# Altium PCB JLINK_OB_TYPEC.PcbDoc
Units mil, origin at the board's own origin, x right, y up, seen from the top; angles counter-clockwise.
Board outline 590.55 x 1299.21 mil, 2 copper layers (Top Layer, Bottom Layer), stack 61.855 mil thick; 26 components, 25 nets, 143 pads, 33 vias.
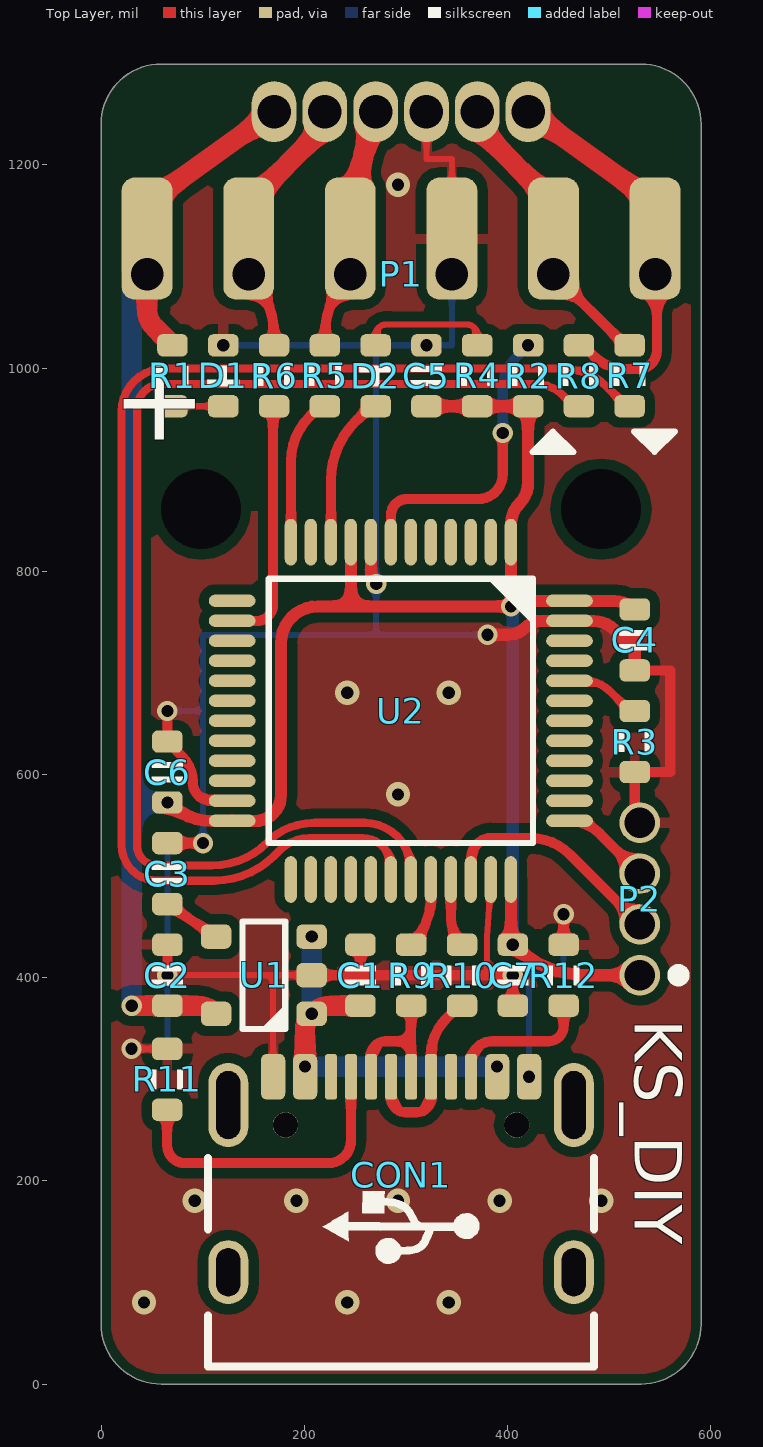
[diagram p0: Top Layer view]
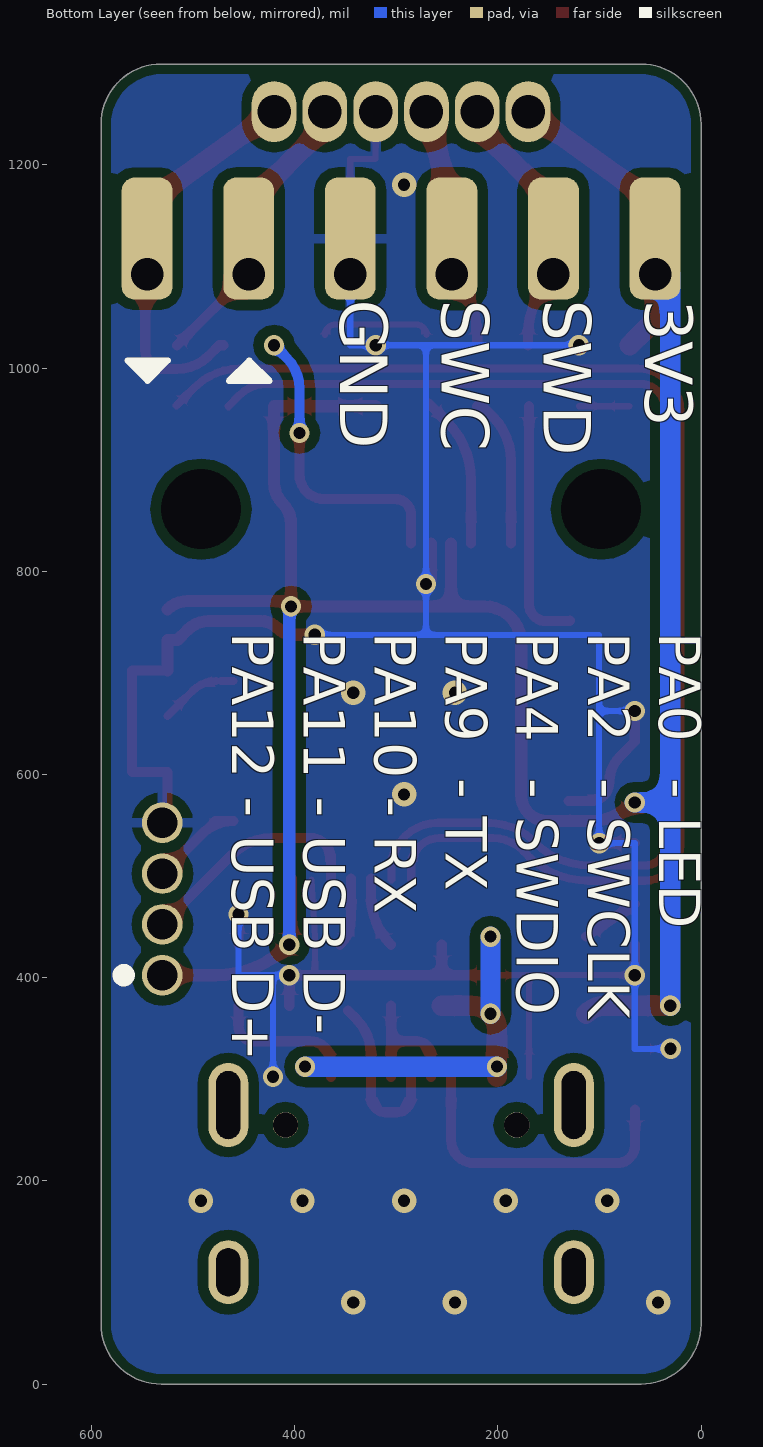
[diagram p1: Bottom Layer view, seen from below]
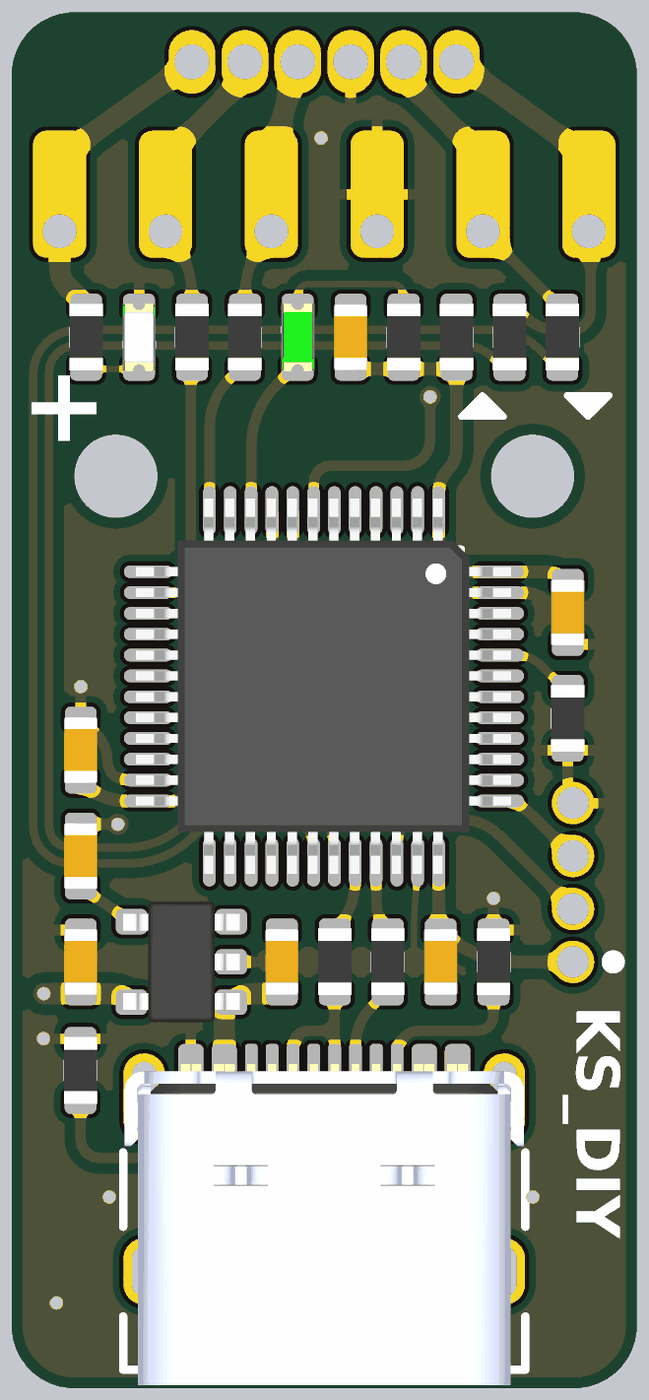
[diagram p2: 3D render of the assembled board from above, using the file's embedded part models]

## Layer stack, top to bottom
Top Solder: solder mask 0.4, Solder Resist, Dk 3.5
Top Layer: signal copper 1.4
Dielectric 1: dielectric 59.0551, FR-4, Dk 4.8
Bottom Layer: signal copper 1.4
Bottom Solder: solder mask 0.4, Solder Resist, Dk 3.5

## Board outline
0,59.06 0,1240.16 cw(c59.06,1240.16) 59.06,1299.21 531.5,1299.21 cw(c531.5,1240.16) 590.55,1240.16 590.55,59.06 cw(c531.5,59.06) 531.5,0 59.06,0 cw(c59.06,59.06)

## Design rules (kind name [scope] priority, off if disabled: settings)
BoardOutlineClearance [All] p1: gap=10 ignorepadtopadclearanceinfootprint=FALSE
Clearance "Clearance Polygon 10mil" [InPolygon] p1: gap=10 ignorepadtopadclearanceinfootprint=TRUE except(0: Arc-Hole Track-Hole SMDPad-Hole THPad-Hole Via-Hole Fill-Hole Poly-Hole Region-Hole Text-Hole)
Clearance "Clearance Top Layer 6mil" [OnLayer('Top Layer')] p2: gap=6 ignorepadtopadclearanceinfootprint=TRUE except(8: Arc-Hole Track-Hole SMDPad-Hole THPad-Hole Via-Hole Fill-Hole Poly-Hole Region-Hole Text-Hole; 10: Arc-Text Track-Text SMDPad-Text THPad-Text Via-Text Fill-Text Poly-Text Region-Text Text-Text)
Clearance "Clearance Top Layer 5mil" [OnLayer('Top Layer')] p3 off: gap=5 ignorepadtopadclearanceinfootprint=TRUE except(8: Arc-THPad Arc-Hole Track-THPad Track-Hole SMDPad-THPad SMDPad-Hole THPad-THPad THPad-Hole Via-Hole Fill-Hole Poly-Hole Region-Hole Text-Hole; 10: Arc-Text Track-Text SMDPad-Text THPad-Text Via-Text Fill-Text Poly-Text Region-Text Text-Text)
Clearance "Clearance Bottom Layer 6mil" [OnLayer('Bottom Layer')] p4: gap=6 ignorepadtopadclearanceinfootprint=TRUE except(8: Arc-THPad Arc-Hole Track-THPad Track-Hole SMDPad-THPad SMDPad-Hole THPad-THPad THPad-Hole Via-Hole Fill-Hole Poly-Hole Region-Hole Text-Hole; 10: Arc-Text Track-Text SMDPad-Text THPad-Text Via-Text Fill-Text Poly-Text Region-Text Text-Text)
Clearance "Clearance Bottom Layer 5mil" [OnLayer('Bottom Layer')] p5 off: gap=5 ignorepadtopadclearanceinfootprint=TRUE except(8: Arc-THPad Arc-Hole Track-THPad Track-Hole SMDPad-THPad SMDPad-Hole THPad-THPad THPad-Hole Via-Hole Fill-Hole Poly-Hole Region-Hole Text-Hole; 10: Arc-Text Track-Text SMDPad-Text THPad-Text Via-Text Fill-Text Poly-Text Region-Text Text-Text)
Clearance "Clearance 6mil" [All] p6: gap=6 ignorepadtopadclearanceinfootprint=TRUE except(8: Arc-THPad Arc-Hole Track-THPad Track-Hole SMDPad-THPad SMDPad-Hole THPad-THPad THPad-Hole Via-Hole Fill-Hole Poly-Hole Region-Hole Text-Hole; 10: Arc-Text Track-Text SMDPad-Text THPad-Text Via-Text Fill-Text Poly-Text Region-Text Text-Text)
Clearance "Clearance 5mil" [All] p7 off: gap=5 ignorepadtopadclearanceinfootprint=TRUE except(8: Arc-THPad Arc-Hole Track-THPad Track-Hole SMDPad-THPad SMDPad-Hole THPad-THPad THPad-Hole Via-Hole Fill-Hole Poly-Hole Region-Hole Text-Hole; 10: Arc-Text Track-Text SMDPad-Text THPad-Text Via-Text Fill-Text Poly-Text Region-Text Text-Text)
Clearance "Clearance 4mil" [All] p8 off: gap=5 ignorepadtopadclearanceinfootprint=TRUE except(4: Arc-Arc Arc-Track Arc-SMDPad Track-Track Track-SMDPad SMDPad-SMDPad; 8: Arc-THPad Arc-Hole Track-THPad Track-Hole SMDPad-THPad SMDPad-Hole THPad-THPad THPad-Hole Via-Hole Fill-Hole Poly-Hole Region-Hole Text-Hole; 10: Arc-Text Track-Text SMDPad-Text THPad-Text Via-Text Fill-Text Poly-Text Region-Text Text-Text)
ComponentClearance [All] p1: gap=0 collisioncheckmode=3 verticalgap=0 showdistances=FALSE
Height [All] p1: minheight=0 maxheight=5000 prefheight=500
HoleSize [All] p1: absolutevalues=TRUE maxlimit=248.03 minlimit=8 maxpercent=80.000 minpercent=20.000
MinimumAnnularRing [All] p1: minimumring=3
MinimumSolderMaskSliver [All] p1: minsoldermaskwidth=0
PlaneConnect [All] p1: pad.planeconnectstyle=Relief pad.reliefexpansion=20 pad.reliefentries=4 pad.reliefconductorwidth=10 pad.reliefairgap=10 via.planeconnectstyle=Direct via.reliefexpansion=20 via.reliefentries=4 via.reliefconductorwidth=10 via.reliefairgap=10
PolygonConnect [All] p1: thpad.connectstyle=Relief thpad.reliefconductorwidth=10 thpad.reliefentries=4 thpad.polygonreliefangle="90 Angle" thpad.airgapwidth=10 smdpad.connectstyle=Relief smdpad.reliefconductorwidth=10 smdpad.reliefentries=4 smdpad.polygonreliefangle="90 Angle" smdpad.airgapwidth=10 via.connectstyle=Direct via.reliefconductorwidth=10 via.reliefentries=4 via.polygonreliefangle="90 Angle" via.airgapwidth=10
RoutingCorners [All] p1: cornerstyle=Round minsetback=100 maxsetback=100
RoutingVias [All] p1: holewidth=20 width=40 viastyle="Through Hole" minholewidth=8 minwidth=18 maxholewidth=40 maxwidth=80
SMDEntry [All] p1: side=TRUE corner=TRUE anyangle=TRUE
SMDToCorner [All] p1: distance=0
SMDToPlane [All] p1: distance=0
SilkToSilkClearance [All] p1: silktosilkclearance=4
SilkToSolderMaskClearance [IsPad] p1: minsilkscreentomaskgap=0 clearancetoexposedcopper=TRUE
SolderMaskExpansion [All] p1: expansion=4 istentingtop=FALSE
UnRoutedNet [All] p1: checkbadconnections=TRUE
ViasUnderSMD [All] p1: allowed=TRUE
Width "Width 6mil" [All] p1: maxlimit=100 minlimit=6 preferedwidth=15 minimp=50.000000 maximp=50.000000 favimp=50.000000
Width "Width 5mil" [All] p2 off: maxlimit=100 minlimit=5 preferedwidth=15 minimp=50.000000 maximp=50.000000 favimp=50.000000
21 further rules are at their usual default settings.

## Components (designator, comment, footprint, x,y, rotation, side; value= is the part's Value field where it differs from the comment)
C1 "C0603" CAP_0603 255.28,402.48 r270 top value=10uF
C2 "C0603" CAP_0603 65.28,402.48 r270 top value=4.7uF
C3 "C0603" CAP_0603 65.28,502.48 r270 top value=NC
C4 "C0603" CAP_0603 525.28,732.48 r90 top value=0.1uF
C5 "C0603" CAP_0603 320.28,992.48 r270 top value=0.1uF
C6 "C0603" CAP_0603 65.28,602.48 r270 top value=0.1uF
C7 "C0603" CAP_0603 405.28,402.48 r90 top value=0.1uF
CON1 "USB Type C" USB_TypeC_16P 295.28,152.48 r0 top locked value="Type C"
D1 "D0603" LED_0603_YELLOW 120.28,992.48 r270 top value=WHITE
D2 "D0603" LED_0603_GREEN 270.28,992.48 r90 top value=GREEN
P1 "HDR1x6" HDR1X6_2.54_180 45.28,1092.48 r90 top value=2.54
P2 "HDR1x4" HDR1X4_1.27_180 530.28,402.48 r180 top value=1.27
R1 "R0603" RES_0603 70.28,992.48 r90 top value=1K
R2 "R0603" RES_0603 420.28,992.48 r270 top value=10K
R3 "R0603" RES_0603 525.28,632.48 r90 top value=10K
R4 "R0603" RES_0603 370.28,992.48 r270 top value=1K
R5 "R0603" RES_0603 220.28,992.48 r270 top value=100R
R6 "R0603" RES_0603 170.28,992.48 r270 top value=100R
R7 "R0603" RES_0603 520.28,992.48 r270 top value=100R
R8 "R0603" RES_0603 470.28,992.48 r270 top value=100R
R9 "R0603" RES_0603 305.28,402.48 r90 top value=22R
R10 "R0603" RES_0603 355.28,402.48 r90 top value=22R
R11 "R0603" RES_0603 65,300 r270 top value=5.1K
R12 "R0603" RES_0603 455.28,402.48 r270 top value=5.1K
U1 "XC6220B331" SOT23-5 160.28,402.48 r180 top value=3.3V
U2 "STM32F072CBT6" LQFP48_P0.5_7.0x7.0 295,662.73 r270 top value=48MHz

## Footprints (in the part's own frame and the unit in brackets; to place one, negate y for a bottom-side part, rotate by r counter-clockwise, add the part's x,y. Pads: shape width x height; smd on the part's side, far side on the other; paste and mask are expansions set on the pad)
CAP_0603 [mil]
  rrect50% 22x30 smd: 1(-30,0) 2(30,0)
  silkscreen extent -10,-15 10,15, body extent -31,-16 31,16, height 31
HDR1X4_1.27_180 [mil]
  round 40 hole 30: 1(0,0) 2(0,-50) 3(0,-100) 4(0,-150)
HDR1X6_2.54_180 [mil]
  round 50 hole 32: 1(0,0) 2(0,-100) 3(0,-200) 4(0,-300) 5(0,-400) 6(0,-500)
LED_0603_GREEN [mil]
  rrect50% 22x30 smd: 1(30,0) 2(-30,0)
  silkscreen extent -10,-16 10,16, body extent -32,-16 32,16, height 24
LED_0603_YELLOW [mil]
  rrect50% 22x30 smd: 1(30,0) 2(-30,0)
  silkscreen extent -10,-16 10,16, body extent -32,-16 32,16, height 24
LQFP48_P0.5_7.0x7.0 [mil]
  oval 46x12 smd: 1(-166,108.27) 2(-166,88.58) 3(-166,68.9) 4(-166,49.21) 5(-166,29.53) 6(-166,9.84) 7(-166,-9.84) 8(-166,-29.53) 9(-166,-49.21) 10(-166,-68.9) 11(-166,-88.58) 12(-166,-108.27) 25(166,-108.27) 26(166,-88.58) 27(166,-68.9) 28(166,-49.21) 29(166,-29.53) 30(166,-9.84) 31(166,9.84) 32(166,29.53) 33(166,49.21) 34(166,68.9) 35(166,88.58) 36(166,108.27)
  oval 12x46 smd: 13(-108.27,-166) 14(-88.58,-166) 15(-68.9,-166) 16(-49.21,-166) 17(-29.53,-166) 18(-9.84,-166) 19(9.84,-166) 20(29.53,-166) 21(49.21,-166) 22(68.9,-166) 23(88.58,-166) 24(108.27,-166) 37(108.27,166) 38(88.58,166) 39(68.9,166) 40(49.21,166) 41(29.53,166) 42(9.84,166) 43(-9.84,166) 44(-29.53,166) 45(-49.21,166) 46(-68.9,166) 47(-88.58,166) 48(-108.27,166)
  silkscreen extent -130,-130 130,130, body extent -177,-178 177,177, height 61
RES_0603 [mil]
  rrect50% 22x30 smd: 1(-30,0) 2(30,0)
  silkscreen extent -10,-16 10,16, body extent -31,-16 31,16, height 18
SOT23-5 [mil]
  rrect50% 30x24 smd: 1(-47,38) 2(-47,0) 3(-47,-38) 4(47,-38) 5(47,38)
  silkscreen extent -21,-53 21,53, body extent -55,-57 55,57, height 45
USB_TypeC_16P [mm]
  rrect50% 0.61x1.143 smd: 1(-3.2,3.81) 2(-2.4,3.81) 11(2.4,3.81) 12(3.2,3.81)
  rrect50% 0.305x1.143 smd: 3(-1.75,3.81) 4(-1.25,3.81) 5(-0.75,3.81) 6(-0.25,3.81) 7(0.25,3.81) 8(0.75,3.81) 9(1.25,3.81) 10(1.75,3.81)
  oval 1x2.1 hole 0.6 slot 1.7 at 90 deg: SH(-4.32,3.105) SH(4.32,3.105)
  oval 1x1.6 hole 0.6 slot 1.2 at 90 deg: SH(-4.32,-1.075) SH(4.32,-1.075)
  round 0.635 hole 0.635 unplated: ""(-2.89,2.605) ""(2.89,2.605)
  silkscreen extent -4.83,-3.43 4.83,1.78, body extent -4.79,-3.8 4.79,3.91, height 3.31

## Part data
C1 C2 C3 C4 C5 C6 C7: library part Cap_0603, "Capacitor", Note=?0%, Specification="X7R, 16V", Type=0603
CON1: library part USB_TypeC_16P_A, "USB", Type=Female
D1 D2: library part LED_0603, "LED", Type=0603
P1: library part HDR1x6_2.54T, "Header", Note=1x6, Type=DIP
P2: library part HDR1x4_1.27, "Header", Note=1x4, Type=DIP
R1 R2 R3 R4 R5 R6 R7 R8 R9 R10 R11 R12: library part Res_0603, "Resistor", Note=?%, Specification=1/10W, Type=0603
U1: library part XC6220x_SOT25, "LDO", Manufacturer="Torex Semiconductor", Datasheet=https://www.torexsemi.com/file/xc6220/XC6220.pdf, Link=https://www.torexsemi.com/products/single-type-voltage-regulators/series/?name=xc6220, Note=6.5V, Specification=1000mA, Type=SOT23-5
U2: library part STM32F072CxT, "MCU ST", Manufacturer=STMicroelectronics, Datasheet=https://www.st.com/resource/en/datasheet/stm32f072cb.pdf, Link=https://www.st.com/content/st_com/en/products/microcontrollers-microprocessors/stm32-32-bit-arm-cortex-mcus/stm32-mainstream-mcus/stm32f0-series/stm32f0x2/stm32f072cb.html, Note=CortexM0, Specification="128K Flash, 16K SRAM", Type=LQFP48

## Free pads (board coordinates)
  rrect50% 50x120 smd paste-100: 1(45.28,1127.48) 1(145.28,1127.48) 1(245.28,1127.48) 1(345.28,1127.48) 1(445.28,1127.48) 1(545.28,1127.48)
  rrect50% 50x120 smd far side paste-100: 1(45.28,1127.48) 1(145.28,1127.48) 1(245.28,1127.48) 1(345.28,1127.48) 1(445.28,1127.48) 1(545.28,1127.48)
  oval 0x50 hole 78.74 unplated: 1(98.43,861.14) 1(492.13,861.14)
  oval 44x60 hole 33: 1(170.28,1252.48) 1(220.28,1252.48) 1(270.28,1252.48) 1(320.28,1252.48) 1(370.28,1252.48) 1(420.28,1252.48)

## Via types
v1: diameter 20, hole 12, Top Layer to Bottom Layer, tented both sides, 21 vias
v2: diameter 24, hole 12, Top Layer to Bottom Layer, tented both sides, 12 vias

## Nets (pads, with @x,y where several pads share a name; then routed paths per layer and width w, separated by ;. In a path a pad name is that pad's centre, name@x,y a point inside that pad or via, vN(x,y) a via of type N, cw(c..) or ccw(c..) an arc to the next point about the centre after c; other vN are vias at no path point)
+3V3: C2.2 C4.2 C5.2 C6.2 C7.2 P1.1 P2.1 pad.1@45.28,1127.48 pad.1@170.28,1252.48 R1.2 R2.2 R4.2 U1.5 U2.1 U2.9 U2.24 U2.36 U2.48 | length 2656.3
  Top Layer w12: v1(65.28,572.48) ccw(c109.38,616.58) 109.38,554.21 U2.24@130.28,554.21 ; U2.24 129.25,554.21 151.63,554.21 ccw(c151.63,579.63) 177.05,579.63 177.05,729.25 cw(c213.28,729.25) 213.28,765.48 246.06,765.48 ; U2.9@246.06,827.48 246.06,765.48 ; C5.2 R4.2 R2.2 420.28,887.11 cw(c391.71,887.11) 411.91,866.91 ccw(c432.11,846.71) 403.54,846.71 403.54,827.48 v1@403.54,770.75 ; C7.2@403.54,432.48 U2.36@403.54,497.48 ; v1(405.28,432.48) ccw(c477.7,504.91) 477.7,402.48 477.77,402.48 P2.1 ; C4.2 ccw(c505.32,742.52) 505.32,770.75 460.28,770.75 v1@403.54,770.75 ; 246.06,765.48 v1(403.54,765.48) v1@403.54,770.75
  Top Layer w20: v1(30.28,372.48) C2.2 93.96,372.48 cw(c93.96,345.17) U1.5 ; P1.1 45.28,1057.48 ccw(c69.42,1057.48) 52.33,1040.42 R1.2 ; pad.1@45.28,1162.48 pad.1@170.28,1252.48
  Bottom Layer w12: v1(405.28,432.48) v1@405.28,765.48
  Bottom Layer w20: v1(30.28,372.48) 30.28,572.48 ; P1.1@30.28,1092.48 30.28,572.48 ; P1.1 pad.1@45.28,1127.48 ; v1(65.28,572.48) 30.28,572.48
+VIN: C1.2 CON1.2 CON1.11 U1.1 U1.3 | length 378.8
  Top Layer w20: CON1.2 v1(200.79,312.48) 200.79,348.82 cw(c222.94,348.82) v1(207.28,364.48) cw(c226.59,345.17) 226.59,372.48 C1.2
  Bottom Layer w20: v1(200.79,312.48) v1(389.76,312.48) ; v1(207.28,364.48) v1(207.28,440.48)
BOOT: R3.2 U2.44 | length 72.9
  Top Layer w8: U2.44@460.28,692.01 U2.44@472.27,692.01 ; U2.44@477.27,692.01 cw(c477.27,659.48) 500.27,682.49 R3.2@525.28,657.48
D+: CON1.6 CON1.8 R10.1 | length 169.2
  Top Layer w10: CON1.6 285.43,281.81 ccw(c299.69,281.81) 299.69,267.56 310.55,267.56 ccw(c310.55,281.81) 324.8,281.81 CON1.8 324.8,324.02 cw(c374.98,324.02) 339.5,359.5 R10.1@347.48,367.48
D-: CON1.5 CON1.7 R9.1 | length 138.2
  Top Layer w10: CON1.5 265.75,323.15 cw(c280,323.15) 280,337.4 305.12,337.4 ; CON1.7 305.12,337.4 ; R9.1 305.12,372.32 305.12,337.4
GND: C1.1 C2.1 C3.1 C4.1 C5.1 C6.1 C7.1 CON1.1 CON1.12 D1.2 P1.4 P2.4 pad.1@320.28,1252.48 pad.1@345.28,1127.48 R3.1 R11.1 R12.1 U1.2 U2.8 U2.23 U2.35 U2.47 | length 3063.3
  Top Layer w6: v1(30,330) R11.1 ; v1(65.28,402.48) 169.29,402.48 ; CON1.1 169.29,402.48 ; U1.2 169.29,402.48 ; pad.1@320.28,1252.48 320.28,1206 345.28,1206 pad.1@345.28,1127.48 ; 380,402.48 380,439.81 ; 380.01,440.19 U2.35
  Top Layer w10: v1(65.28,402.48) C2.1 ; C3.1 v1(100.28,532.48) ; v1(65.28,662.48) C6.1 79.67,618.09 cw(c54.06,592.48) 90.28,592.48 ccw(c108.86,592.48) 108.86,573.9 U2.23@130.28,573.9 ; U1.2 255.28,402.48 ; C1.1 255.28,402.48 ; C7.1 v1(405.28,402.48) 380,402.48 255.28,402.48 ; R12.1 v1(455.28,462.48) ; P2.4@525.28,557.48 R3.1 560.28,602.48 560.28,702.48 C4.1
  Top Layer w12: U2.8@265.75,827.48 265.75,792.48 v1(270.75,787.48) ; v1(380.28,737.48) 400.67,737.48 ccw(c400.67,760.67) 417.07,744.27 cw(c433.46,727.88) 433.46,751.06 484.56,751.06 cw(c484.56,721.76) 505.28,742.48 515.28,732.48 525.28,732.48 C4.1
  Bottom Layer w6: v1(30,330) 65.28,330 v1(65.28,402.48) 65.28,532.48 v1(100.28,532.48) 100.28,662.48 ; v1(65.28,662.48) 100.28,662.48 ; v1(120.28,1022.48) 270.75,1022.48 ; P1.4 345.28,1022.48 v1(320.28,1022.48) 270.75,1022.48 ; v1(380.28,737.48) 270.75,737.48 ; v1(405.28,402.48) 421.26,402.48 ; v1(421.26,302.48) 421.26,402.48 ; v1(455.28,462.48) 455.28,402.48 421.26,402.48 ; 100.28,662.48 100.28,737.48 270.75,737.48 ; 270.75,737.48 v1(270.75,787.48) 270.75,1022.48
  Bottom Layer w10: P1.4 pad.1@345.28,1127.48
  other v2: 42.28,80.48 242.28,80.48 342.28,80.48 92.28,180.48 192.28,180.48 292.28,180.48 392.28,180.48 492.28,180.48 292.28,580.48 242.28,680.48 342.28,680.48 292.28,1180.48
JK_LED: D2.2 U2.10 | length 151.1
  Top Layer w10: U2.10@226.38,827.48 226.38,889.79 cw(c307.97,889.79) 250.28,947.48 D2.2@267.78,964.98
JK_RX: R8.2 U2.31 | length 1209.3
  Top Layer w8: 163.74,533.17 cw(c108.93,588.04) 108.93,510.48 55.28,510.48 cw(c55.28,530.48) 35.28,530.48 35.28,959.48 cw(c60.28,959.48) 60.28,984.48 427.72,984.48 cw(c427.72,946.92) 454.25,973.51 ; 163.77,533.2 165.79,535.21 cw(c205.06,495.94) 165.85,535.27 cw(c205.06,495.94) 192.75,550.1 ccw(c190.97,557.9) 193.07,550.18 cw(c210.32,486.64) 210.32,552.48 ; 210.37,552.48 259.16,552.48 cw(c259.16,506.8) 304.84,506.8 U2.31 ; 454.28,973.48 R8.2@465.28,962.48
JK_SWC: R5.2 U2.12 | length 148.5
  Top Layer w10: U2.12@187.01,827.48 187.01,908.38 cw(c249.38,908.38) 205.28,952.48 211.74,958.94 cw(c220.28,950.41) R5.2
JK_SWD: R6.2 U2.14 | length 244.8
  Top Layer w10: U2.14 129.25,751.06 152.86,751.06 ccw(c152.86,767.48) 169.28,767.48 R6.2@169.28,962.48
JK_TX: R7.2 U2.30 | length 1285.1
  Top Layer w8: 175.69,525.31 170.5,520.13 cw(c111,579.62) 111,495.48 55.28,495.48 cw(c55.28,530.48) 20.28,530.48 20.28,957.48 cw(c62.28,957.48) 62.28,999.48 454.26,999.48 cw(c454.26,937.46) 498.09,981.33 ; 175.7,525.33 cw(c205.06,495.94) 205.06,537.48 257.43,537.48 cw(c257.43,509.67) 285.25,509.67 285.25,496.82 U2.30 ; 498.11,981.32 R7.2@516.28,963.15
NetC3_2: C3.2 U1.4 | length 57.7
  Top Layer w10: C3.2 U1.4
NetCON1_4: CON1.4 R11.2 | length 301.4
  Top Layer w10: R11.2 65,235 ccw(c82.52,235) 82.52,217.48 223.43,217.48 ccw(c223.43,240.11) 246.06,240.11 CON1.4
NetCON1_10: CON1.10 R12.2 | length 145.7
  Top Layer w10: CON1.10 364.17,316.69 cw(c384.96,316.69) 384.96,337.48 440.28,337.48 ccw(c440.28,352.48) 455.28,352.48 R12.2
NetD1_1: D1.1 R1.1 | length 50
  Top Layer w6: R1.1 D1.1
NetD2_1: D2.1 R4.1 | length 111.4
  Top Layer w6: D2.1@270.28,1032.81 cw(c280.28,1032.81) 280.28,1042.81 360.28,1042.81 cw(c360.28,1032.81) R4.1@370.28,1032.81
RST: R2.1 U2.7 | length 291.3
  Top Layer w10: U2.7@285.43,827.48 285.43,855.43 cw(c301.15,855.43) 301.15,871.15 371.15,871.15 ccw(c371.15,895.28) 395.28,895.28 v1(395.28,936.15)
  Bottom Layer w10: v1@395.28,941.15 395.28,979.8 cw(c437.95,979.8) 407.78,1009.98 v1(420.28,1022.48)
SWCLK: P2.3 U2.37 | length 107.8
  Top Layer w10: U2.37@478.54,554.21 460.28,554.21 cw(c460.28,510.11) 491.46,541.3 P2.3
SWDIO: P2.2 U2.34 | length 230.2
  Top Layer w10: U2.34@364.28,497.58 364.28,517.48 cw(c384.28,517.48) 384.28,537.48 422.5,537.48 cw(c422.5,482.5) 461.34,521.41 ; 461.38,521.38 P2.2
TG_RX: P1.5 pad.1@370.28,1252.48 pad.1@445.28,1127.48 R7.1 | length 220.1
  Top Layer w10: P1.5@445.78,1092.48 R7.1@515.78,1022.48
  Top Layer w20: pad.1@370.28,1252.48 370.28,1237.48 pad.1@445.28,1162.48
TG_SWC: P1.3 pad.1@245.28,1127.48 pad.1@270.28,1252.48 R5.1 | length 170.1
  Top Layer w10: R5.1 220.28,1032.13 cw(c305.63,1032.13) P1.3
  Top Layer w20: pad.1@245.28,1162.48 pad.1@270.28,1252.48
TG_SWD: P1.2 pad.1@145.28,1127.48 pad.1@220.28,1252.48 R6.1 | length 197.7
  Top Layer w10: P1.2 cw(c84.92,1032.13) 170.28,1032.13 R6.1
  Top Layer w20: pad.1@145.28,1162.48 220.28,1237.48 pad.1@220.28,1252.48
TG_TX: P1.6 pad.1@420.28,1252.48 pad.1@545.28,1127.48 R8.1 | length 360.3
  Top Layer w10: R8.1 474.28,1022.48 484.78,1011.98 ccw(c516.11,1043.32) 516.11,999 529,999 ccw(c529,1017) 547,1017 547,1125.76 ccw(c545.28,1125.76) pad.1@545.28,1127.48
  Top Layer w20: pad.1@420.28,1252.48 pad.1@545.28,1162.48
USB_DM: R9.2 U2.32 | length 70.2
  Top Layer w10: R9.2 ccw(c258.13,479.62) 324.8,479.62 U2.32@324.8,497.48
USB_DP: R10.2 U2.33 | length 67.9
  Top Layer w10: U2.33@344.49,497.48 344.49,458.52 ccw(c381.32,458.52) R10.2
pads on no net: CON1. CON1.3 CON1.9 CON1.SH U2.2 U2.3 U2.4 U2.5 U2.6 U2.11 U2.13 U2.15 U2.16 U2.17 U2.18 U2.19 U2.20 U2.21 U2.22 U2.25 U2.26 U2.27 U2.28 U2.29 U2.38 U2.39 U2.40 U2.41 U2.42 U2.43 U2.45 U2.46

## Polygon pours and split planes (outlines as drawn)
GND on Top Layer "Top Layer-GND" (solid, remove dead copper, pour order 2): 0,59.06 0,1240.16 cw(c59.06,1240.16) 59.06,1299.21 531.5,1299.21 cw(c531.5,1240.16) 590.55,1240.16 590.55,59.06 cw(c531.5,59.06) 531.5,0 59.06,0 cw(c59.06,59.06)
GND on Bottom Layer "Bottom Layer-GND" (solid, remove dead copper, pour order 3): 0,59.06 0,1240.16 cw(c59.06,1240.16) 59.06,1299.21 531.5,1299.21 cw(c531.5,1240.16) 590.55,1240.16 590.55,59.06 cw(c531.5,59.06) 531.5,0 59.06,0 cw(c59.06,59.06)

## Silkscreen, mask and mechanical layers (free items; w line width, h text height)
Top Overlay:
  circle w12: c568.28,402.48 r5
  region: 444.72,937.48 464.72,917.48 424.72,917.48
  region: 544.72,917.48 524.72,937.48 564.72,937.48
  lines w6: 424.72,917.48 464.72,917.48 444.72,937.48 424.72,917.48 ; 524.72,937.48 544.72,917.48 564.72,937.48 524.72,937.48
  text "+" at 10.28,902.48 h140
  text "KS_DIY" at 510,359 h80 r270
Bottom Overlay:
  circle w12: c568.28,402.48 r5
  region: 544.72,987.48 524.72,1007.48 564.72,1007.48
  region: 444.72,1007.48 464.72,987.48 424.72,987.48
  lines w6: 424.72,987.48 464.72,987.48 444.72,1007.48 424.72,987.48 ; 524.72,1007.48 564.72,1007.48 544.72,987.48 524.72,1007.48
  text "3V3" at 70.28,1067.48 h80 r90
  text "SWD" at 170.28,1067.48 h80 r90
  text "SWC" at 270.28,1067.48 h80 r90
  text "GND" at 370.28,1067.48 h80 r90
  text "PA0  - LED / PA2  - SWCLK / PA4  - SWDIO / PA9  - TX / PA10 - RX / PA11 - USB D- / PA12 - USB D+" at 475,740 h70 r90
Mechanical 1:
  the board outline again, w2
Mechanical 2:
  circle w2: c492.13,861.14 r68.9
  circle w2: c98.43,861.14 r68.9
  circle w2: c492.13,861.14 r39.37
  circle w2: c98.43,861.14 r39.37
  lines w2: 88.43,861.14 108.43,861.14 ; 98.43,851.14 98.43,871.14 ; 482.13,861.14 502.13,861.14 ; 492.13,851.14 492.13,871.14 ; -78.74,-78.74 -78.74,1377.95 669.29,1377.95 669.29,-78.74 -78.74,-78.74 ; 0,59.06 ccw(c59.06,59.06) 59.06,0 531.5,0 ccw(c531.5,59.06) 590.55,59.06 590.55,1240.16 ccw(c531.5,1240.16) 531.5,1299.21 59.06,1299.21 ccw(c59.06,1240.16) 0,1240.16 0,59.06

## Dimensions
98.43,851.14 to 492.13,851.14 on Mechanical 2
0,1240.16 to 590.55,1240.16 on Mechanical 2
531.5,0 to 531.5,1299.21 on Mechanical 2

## Text inside footprints (layer, text, board x,y; h text height)
D1: Bottom Top Componment/Botton Componment "+" at 112.26,971.51 h20 r270
D2: Bottom Top Componment/Botton Componment "+" at 278.29,1013.45 h20 r90